# Altium PCB Layout.PcbDoc
Units mm, origin at the board's own origin, x right, y up, seen from the top; angles counter-clockwise.
Board outline 32.5 x 62 mm, 2 copper layers (Top Layer, Bottom Layer); 41 components, 15 nets, 80 pads, 20 vias.
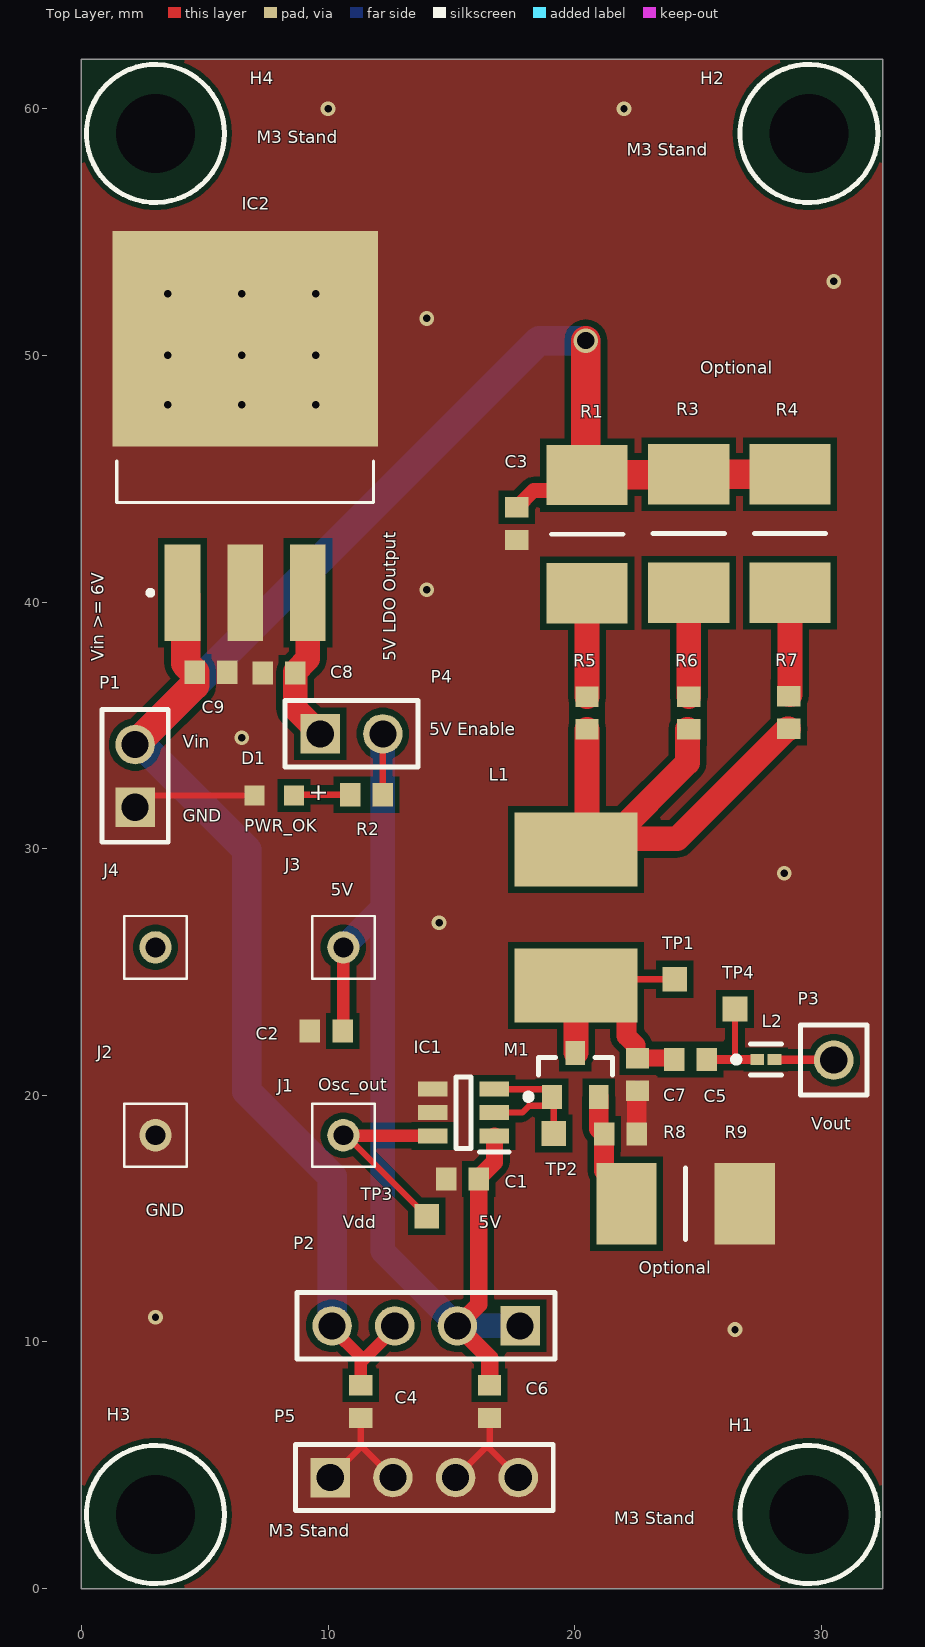
[diagram p0: Top Layer view]
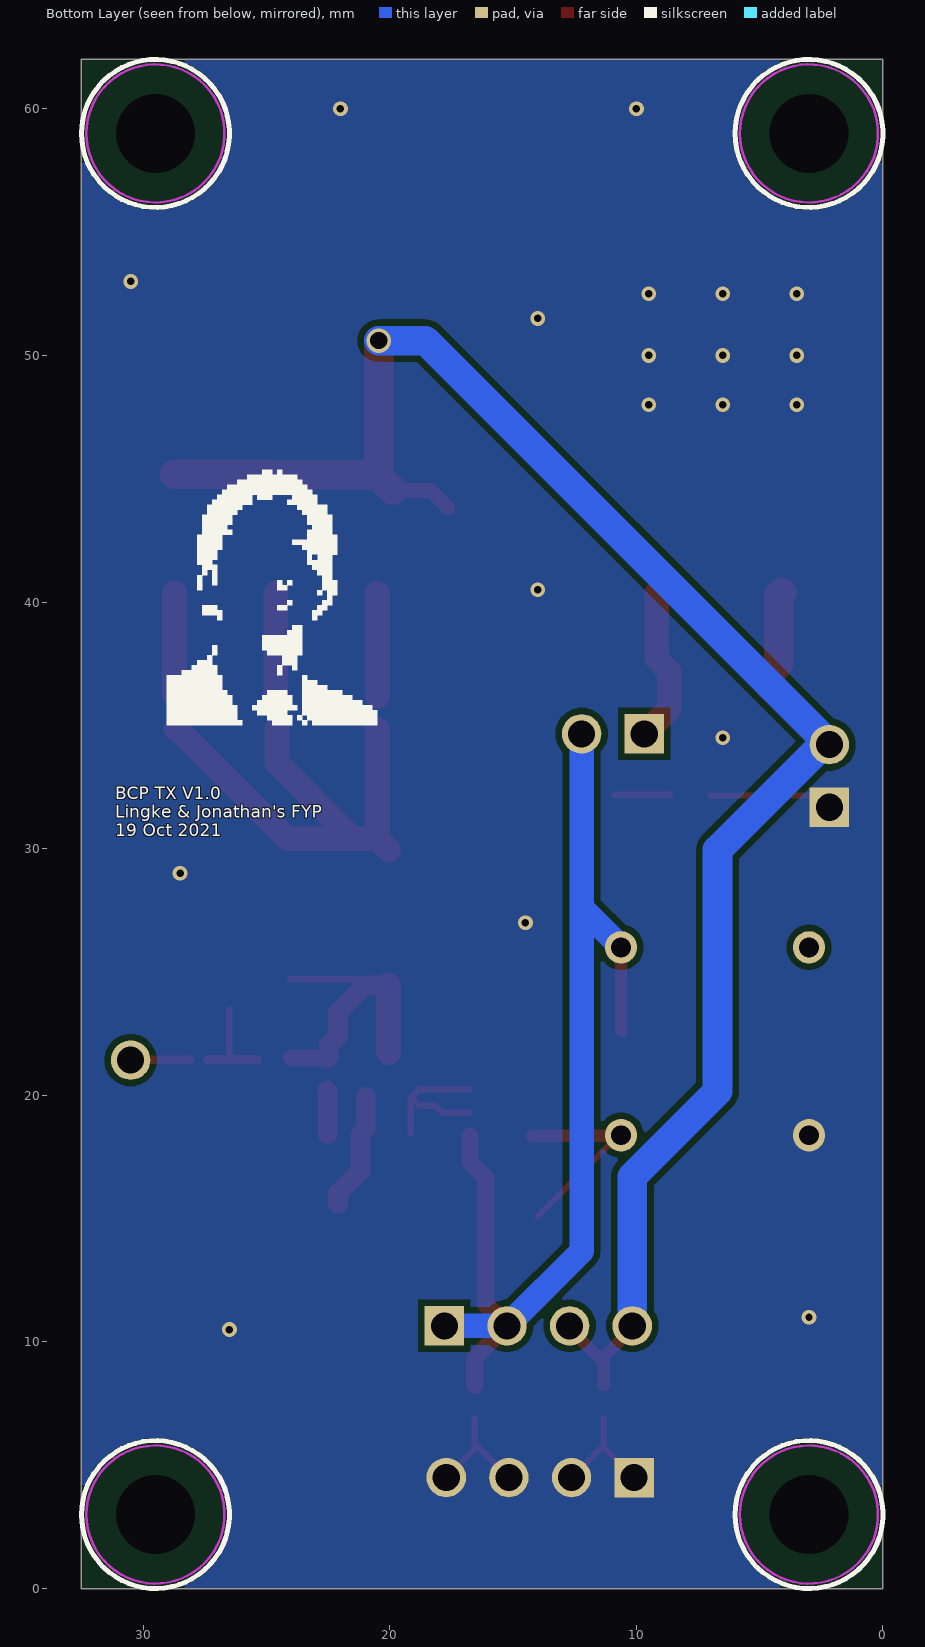
[diagram p1: Bottom Layer view, seen from below]
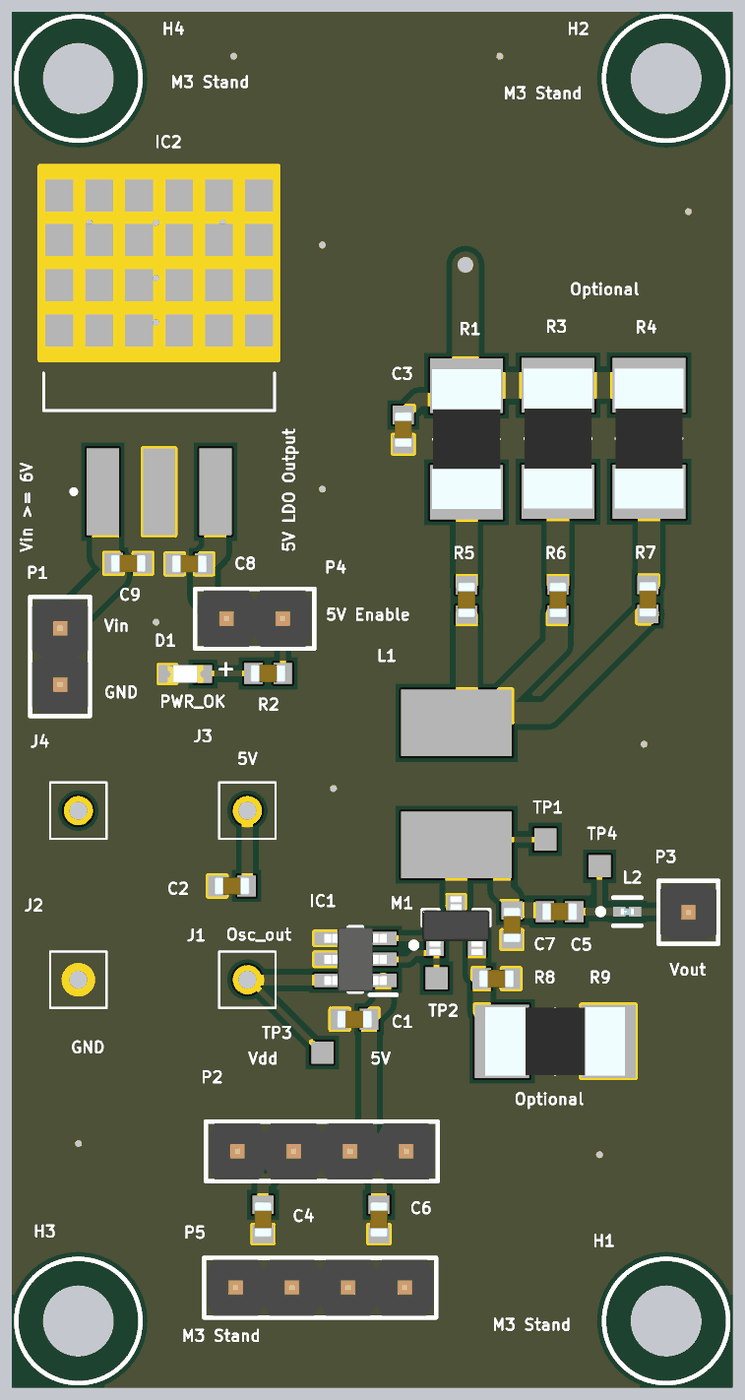
[diagram p2: 3D render of the assembled board from above, using the file's embedded part models]

## Layer stack, top to bottom
Top Solder: solder mask 0.0102, Solder Resist, Dk 3.5
Top Layer: signal copper 0.0356
Dielectric 1: dielectric 0.32, FR-4, Dk 4.8
Bottom Layer: signal copper 0.0356
Bottom Solder: solder mask 0.0102, Solder Resist, Dk 3.5

## Board outline
0,62 32.5,62 32.5,0 0,0

## Design rules (kind name [scope] priority, off if disabled: settings)
Clearance [All] p1: gap=0.254 ignorepadtopadclearanceinfootprint=TRUE except(0: Arc-Hole Track-Hole SMDPad-Hole THPad-Hole Via-Hole Fill-Hole Poly-Hole Region-Hole Text-Hole)
HoleSize [All] p1: absolutevalues=TRUE maxlimit=5 minlimit=0.025 maxpercent=80.000 minpercent=20.000
MinimumSolderMaskSliver [All] p1: minsoldermaskwidth=0.1
PlaneClearance [All] p1: clearance=0.254
PlaneConnect [All] p1: planeconnectstyle=Direct reliefexpansion=0.508 reliefentries=4 reliefconductorwidth=0.254 reliefairgap=0.254
PolygonConnect [All] p1: connectstyle=Direct reliefconductorwidth=0.254 reliefentries=4 polygonreliefangle="90 Angle" airgapwidth=0.254
RoutingVias [All] p1: holewidth=0.711 width=1.27 viastyle="Through Hole" minholewidth=0.3 minwidth=0.6 maxholewidth=2.5 maxwidth=5
SilkToSilkClearance [All] p1: silktosilkclearance=0.1
SilkToSolderMaskClearance [IsPad] p1: minsilkscreentomaskgap=0.1 clearancetoexposedcopper=TRUE
SolderMaskExpansion [All] p1: expansion=0.102 istentingtop=FALSE
Width Vdd [InNet('Vdd')] p1: maxlimit=3 minlimit=0.254 preferedwidth=1.2
Width [All] p2: maxlimit=2 minlimit=0.254 preferedwidth=0.254
24 further rules are at their usual default settings.

## Components (designator, comment, footprint, x,y, rotation, side; value= is the part's Value field where it differs from the comment)
C1 "10uF" 0603 15.45,16.6 r0 top
C2 "0.1uF" 0603 9.925,22.606 r0 top
C3 "10uF" 0603 17.65,43.175 r90 top
C4 "Capacitor" 0603 11.325,7.575 r270 top
C5 "91pF" 0603 24.699,21.45 r0 top
C6 "Capacitor" 0603 16.55,7.575 r270 top
C7 "4.7pF" 0603 22.55,20.85 r90 top
C8 "10uF" 0603 8.004,37.125 r0 top
C9 "10uF" 0603 5.25,37.15 r180 top
D1 "Super Red, 1.9V" WL-SMCW_0603_H=0.7mm 7.819,32.156 r0 top
H1 "M3 Mounting Hole" "M3 Hole" 29.5,3 r0 top
H2 "M3 Mounting Hole" "M3 Hole" 29.5,59 r0 top
H3 "M3 Mounting Hole" "M3 Hole" 3,3 r0 top
H4 "M3 Mounting Hole" "M3 Hole" 3,59 r0 top
IC1 "LM5114B" SOT-23-6 15.494,19.3 r180 top
IC2 "MIC29300-5.0WU" TO-263-3 6.64,46.725 r90 top
J1 "SSA-101-S-T" SSA-101-S-X 10.62,18.38 r0 top
J2 "SSA-101-S-T" SSA-101-S-X 3,18.38 r0 top
J3 "SSA-101-S-T" SSA-101-S-X 10.62,26 r0 top
J4 "SSA-101-S-T" SSA-101-S-X 3,26 r0 top
L1 "47nH" TPI078060L047N 20.05,24.457 r90 top
L2 "76nH" FP-LQP03PN_02-IPC_A 27.749,21.45 r0 top
M1 "IRLML0040TRPBF" SOT-23 20.025,20.825 r90 top
P1 "61300211121" 61300211121 2.175,32.95 r90 top
P2 "61300411121" 61300411121 13.975,10.65 r180 top
P3 "61300111121" 61300111121 30.505,21.425 r90 top
P4 "61300211121" 61300211121 10.95,34.656 r0 top
P5 "61300411121" 61300411121 13.9,4.501 r0 top
R1 "10R" 2512 20.5,42.75 r90 top
R2 "1K" 0603 11.55,32.186 r0 top
R3 "Optional" 2512 24.625,42.775 r90 top
R4 "Optional" 2512 28.729,42.775 r90 top
R5 "0R" 0603 20.5,35.5 r90 top
R6 "0R" 0603 24.625,35.5 r90 top
R7 "0R" 0603 28.675,35.525 r90 top
R8 "Pull Down R" 0603 21.85,18.43 r180 top
R9 "Resistor_2512" 2512 24.5,15.605 r180 top
TP1 "TP" "Test Point" 24.05,24.7 r0 top
TP2 "TP" "Test Point" 19.15,18.45 r0 top
TP3 "TP" "Test Point" 14,15.099 r0 top
TP4 "TP" "Test Point" 26.5,23.5 r0 top

## Footprints (in the part's own frame and the unit in brackets; to place one, negate y for a bottom-side part, rotate by r counter-clockwise, add the part's x,y. Pads: shape width x height; smd on the part's side, far side on the other; paste and mask are expansions set on the pad)
0603 [mm]
  rect 0.83x0.94 smd: 1(-0.66,0) 2(0.66,0)
  body extent -0.8,-0.4 0.8,0.4, height 0.9
2512 [mm]
  rect 2.45x3.3 smd: 1(-2.4,0) 2(2.4,0)
  silkscreen extent 0,-1.45 0,1.45, body extent -3.15,-1.55 3.15,1.55, height 0.8
61300111121 [mm] "Pin Header, pitch 2.54 mm, THT, Vertical, single row, 1p"
  round 1.6 hole 1.1: 1(0,0)
  silkscreen extent -1.42,-1.35 1.42,1.35, body extent -1.27,-1.27 1.27,1.27, height 8.57
61300211121 [mm] "Pin Header, pitch 2.54 mm, THT, Vertical, single row, 2p"
  rect 1.6x1.6 hole 1.1: 1(-1.27,0)
  round 1.6 hole 1.1: 2(1.27,0)
  silkscreen extent -2.69,-1.35 2.69,1.35, body extent -2.54,-1.27 2.54,1.27, height 8.57
61300411121 [mm] "Pin Header, pitch 2.54 mm, THT, Vertical, single row, 4p"
  rect 1.6x1.6 hole 1.1: 1(-3.81,0)
  round 1.6 hole 1.1: 2(-1.27,0) 3(1.27,0) 4(3.81,0)
  silkscreen extent -5.23,-1.35 5.23,1.35, body extent -5.08,-1.27 5.08,1.27, height 8.57
FP-LQP03PN_02-IPC_A [mm]
  rect 0.554x0.463 smd paste+0 mask+0: 1(-0.354,0) 2(0.354,0)
  silkscreen extent -1.32,-0.63 0.63,0.63, body extent -0.83,-0.43 0.83,0.43, height 0.25
"M3 Hole" [mm]
  round 0 hole 3.2 unplated mask+0.1: 1(0,0)
  Keep-Out Layer circle w0.1: c0,0 r2.8
  silkscreen extent -2.8,-2.8 2.8,2.8
SOT-23 [mm] "SOT23, 3-Leads, Body 3.04x1.4mm, Pitch 0.95mm"
  rect 0.972x0.802 smd: 1(-0.885,0.95) 2(-0.885,-0.95) 3(0.885,0)
  silkscreen extent -1.01,-1.5 0.7,2.03, body extent -1.32,-1.52 1.32,1.52, height 1.12
SOT-23-6 [mm]
  rect 1.2x0.6 smd: 1(-1.25,0.95) 2(-1.25,0) 3(-1.25,-0.95) 4(1.25,-0.95) 5(1.25,0) 6(1.25,0.95)
  silkscreen extent -1.85,-1.45 0.3,1.6, body extent -1.4,-1.45 1.4,1.45, height 1.2
SSA-101-S-X [mm]
  round 1.31 hole 0.81: 1(0,0)
  silkscreen extent -1.27,-1.27 1.27,1.27
"Test Point" [mm]
  rect 1x1 smd: 1(0,0)
TO-263-3 [mm]
  rect 3.92x1.45 smd: 1(-6.35,2.54) 2(-6.35,0) 3(-6.35,-2.54)
  rect 8.75x10.75 smd paste-6: 4(3.95,0)
  silkscreen extent -6.45,-5.21 -1,5.21
TPI078060L047N [mm]
  rect 3x5 smd: 1(0,0) 2(5.5,0)
WL-SMCW_0603_H=0.7mm [mm] "SMD Mono-color Chip LED, body 1.6x0.8mm"
  rect 0.8x0.8 smd: 1(-0.8,0) 2(0.8,0)
  body extent -0.8,-0.4 0.8,0.4, height 0.7

## Part data
C1 C2 C3 C5 C7 C8 C9: library part Capacitor, "Capacitor"
D1: library part 150060SS75000, "WL-SMCW SMT Mono-color Chip LED Waterclear, size 0603, Super Red, 1.9V, 140deg", Emitting Color="Super Red", Forward Voltage typ.=1.9V, Operating Temperature="-40 to +85degC", Chip Technology=AlInGaP, ComponentLink1Description=Manufacturer, ComponentLink1URL=http://www.we-online.de, ComponentLink2Description=Datasheet, ComponentLink2URL=https://www.we-online.com/catalog/datasheet/150060SS75000.pdf, Dominant Wavelength typ.=630nm, Luminous Intensity typ.=60mcd, Mounting Technology=SMT, Packaging="Tape and Reel", Part Number=150060SS75000, Peak Wavelength typ.=645nm, Published Date="December 2019", Publisher="Wurth Elektronik", Size=0603, Viewing Angle=140deg
H1 H2 H3 H4: library part M3_Mounting_hole
IC2: Supplier Part Number 1=576-1122-ND, Supplier 1=Digi-Key
J1 J2 J3 J4: "Connector", Manufacturer_Name=SAMTEC, Datasheet Link=http://suddendocs.samtec.com/prints/ssas-mkt.pdf, Manufacturer_Part_Number=SSA-101-S-T
L1: library part TPI078060L047N, Supplier Part Number 1=399-TPI078060L047NCT-ND, Supplier 1=Digi-Key
L2: library part LQP03TN75NH02D, "Film type RF Inductor 75nH ±3% 100mA 10Ω 0201 (0603)", Case Code (Imperial)=0201, Case Code (Metric)=0603, Current Rating=100mA, DC Resistance (DCR)=10R, Inductance=75nH, Max Operating Temperature=125°C, Min Operating Temperature=-55°C, Package Quantity=15000, Resistor Type="Thin Film", Self Resonant Frequency=1GHz, Supplier Part Number 1=490-13018-1-ND, Test Frequency=300MHz, Tolerance=3%, Case/Package=0201, Core Material=Non-Magnetic, Height=0.3mm, Height - Seated (Max)=0.013inch, Length=0.024inch, Max DC Current=100mA, Mount="Surface Mount", Packaging="Tape and Reel", Q Factor=8, RoHS Compliant=Yes, Shielding=Unshielded, Supplier 1=Digi-Key, Termination=SMD/SMT, Weight=6E-06oz, Width=0.012inch
M1: "HEXFET(R) Power MOSFET, 40 V, -55 to 150 degC, 3-Pin SOT-23, RoHS, Tape and Reel", Manufacturer="International Rectifier", Maximum Continuous Drain Current=3.6A, Maximum Drain Source Resistance=0.056Ω, Maximum Drain Source Voltage=40V, Maximum Gate Source Voltage=±16V, Maximum Gate Threshold Voltage=2.5V, Maximum Operating Temperature=+150°C, Maximum Power Dissipation=1.3W, Minimum Gate Threshold Voltage=1V, Minimum Operating Temperature=-55°C, Package Description="3-Pin Small Outline Transistor, Body 2.92 x 1.3 mm, Pitch 0.95 mm", Package Reference=SOT-23, Typical Input Capacitance @ Vds=266pF@25V, Category=PowerMOSFET, Channel Mode=Enhancement, Channel Type=N, Datasheet URL=https://datasheet.ciiva.com/22709/irlml0040pbf-22709201.pdf, Datasheet Version=02/2012, Dimensions=3.04x1.4x1.02mm, Height=1.02mm, Length=3.04mm, Manufacturer URL=http://internationalrectifier.com/, Mounting Technology=SurfaceMount, Mounting Type=SurfaceMount, Number of Elements per Chip=1, Package Type=SOT-23, Pin Count=3, Transistor Configuration=Single, Transistor Material=Si, Typical Gate Charge @ Vgs=2.6nC@4.5V, Typical Turn-Off Delay Time=6.4ns, Typical Turn-On Delay Time=5.1ns, Width=1.4mm
P1 P4: "WR-PHD Pin Header, THT, pitch 2.54mm, Single Row, Vertical, 2p", Contact Resistance=20mOhm, Manufacturer="Wurth Elektronik", Operating Temperature="-40 to +105degC", Rated Current=3A, Withstanding Voltage=500VAC, Working Voltage=250VAC, ComponentLink1Description=Manufacturer, ComponentLink1URL=http://www.we-online.de, ComponentLink2Description=Datasheet, ComponentLink2URL=https://www.we-online.com/catalog/datasheet/61300211121.pdf, Gender="Pin Header", Manufacturer Part Number=61300211121, Mounting Technology=THT, Orientation=Vertical, Packaging=Bag, Pin Number=2, Pitch=2.54mm, Published Date="May 2020", Row Number=Single
P2 P5: "WR-PHD Pin Header, THT, pitch 2.54mm, Single Row, Vertical, 4p", Contact Resistance=20mOhm, Manufacturer="Wurth Elektronik", Operating Temperature="-40 to +105degC", Rated Current=3A, Withstanding Voltage=500VAC, Working Voltage=250VAC, ComponentLink1Description=Manufacturer, ComponentLink1URL=http://www.we-online.de, ComponentLink2Description=Datasheet, ComponentLink2URL=https://www.we-online.com/catalog/datasheet/61300411121.pdf, Gender="Pin Header", Manufacturer Part Number=61300411121, Mounting Technology=THT, Orientation=Vertical, Packaging=Bag, Pin Number=4, Pitch=2.54mm, Published Date="May 2020", Row Number=Single
P3: "WR-PHD Pin Header, THT, pitch 2.54mm, Single Row, Vertical, 1p", Contact Resistance=20mOhm, Manufacturer="Wurth Elektronik", Operating Temperature="-40 to +105degC", Rated Current=3A, Withstanding Voltage=500VAC, Working Voltage=250VAC, ComponentLink1Description=Manufacturer, ComponentLink1URL=http://www.we-online.de, ComponentLink2Description=Datasheet, ComponentLink2URL=https://www.we-online.com/catalog/datasheet/61300111121.pdf, Gender="Pin Header", Manufacturer Part Number=61300111121, Mounting Technology=THT, Orientation=Vertical, Packaging=Bag, Pin Number=1, Pitch=2.54mm, Published Date="May 2020", Row Number=Single
R1 R3 R4: library part Resistor_2512, "Resistor"
R2 R5 R6 R7 R8: library part Resistor, "Resistor"
R9: "Resistor"
TP1 TP2 TP3 TP4: library part "Test Point", "Test Point 1mm by 1mm"

## Via types
v1: diameter 0.6, hole 0.3, Top Layer to Bottom Layer, 19 vias
v2: diameter 1, hole 0.7, Top Layer to Bottom Layer, 1 vias

## Nets (pads, with @x,y where several pads share a name; then routed paths per layer and width w, separated by ;. In a path a pad name is that pad's centre, name@x,y a point inside that pad or via, vN(x,y) a via of type N, cw(c..) or ccw(c..) an arc to the next point about the centre after c; other vN are vias at no path point)
5V: C1.2 C2.2 C6.1 IC1.1 J3.1 P2.1 P2.2 P4.2 R2.2 | length 47.2
  Top Layer w0.254: R2.2 12.22,32.196 P4.2
  Top Layer w0.5: C2.2 10.62,22.641 J3.1
  Top Layer w0.7: C6.1 16.55,9.345 P2.2 16.11,11.515 C1.2 16.11,16.655 16.744,17.289 IC1.1
  Bottom Layer w1: J3.1 12.22,27.6 ; P4.2 12.22,27.6 ; P2.1 P2.2 12.22,13.675 12.22,27.6
GND: C1.1 C2.1 C3.1 C4.2 C6.2 C7.1 C8.1 C9.1 D1.1 IC1.4 IC1.5 IC2.2 IC2.4 J2.1 P1.1 P5.1 P5.2 P5.3 P5.4 R8.1 R9.1 | length 16.4
  Top Layer w0.254: P1.1 2.651,32.156 D1.1 ; P5.1 11.325,5.736 ; C4.2 11.325,5.736 ; P5.2 11.395,5.736 11.325,5.736 ; P5.3 16.55,5.881 ; C6.2 16.55,5.881 ; P5.4 16.55,5.661 16.55,5.881
  Top Layer w0.8: R8.1 22.51,20.15 C7.1
  other v1: 26.5,10.5 3,11 14.5,27 28.5,29 6.5,34.5 14,40.5 3.5,48 6.5,48 9.5,48 3.5,50 6.5,50 9.5,50 14,51.5 3.5,52.5 6.5,52.5 9.5,52.5 30.5,53 10,60 22,60
NetC5_1: C5.1 C7.2 L1.1 M1.3 TP1.1 | length 15.7
  Top Layer w0.254: M1.3 M1.3@20.05,21.735 ; L1.1@22.207,23.084 20.834,24.457 L1.1 20.293,24.7 TP1.1 ; C5.1@23.979,21.51 C5.1
  Top Layer w0.7: C7.2 C5.1@23.979,21.51
  Top Layer w0.8: L1.1 20.999,24.457 22.099,23.357 22.099,22.408 22.48,22.027 22.48,21.525 22.495,21.51 C7.2
  Top Layer w1: M1.3@20.05,21.735 L1.1
NetC5_2: C5.2 L2.1 TP4.1 | length 4.1
  Top Layer w0.254: 26.5,21.45 TP4.1
  Top Layer w0.35: C5.2 26.5,21.45 L2.1
NetC8_2: C8.2 IC2.3 P4.1 | length 6.4
  Top Layer w1: IC2.3 9.18,37.696 8.664,37.18 C8.2 8.664,35.671 P4.1
NetD1_2: D1.2 R2.1 | length 2.3
  Top Layer w0.254: D1.2 8.649,32.186 R2.1
NetIC1_2: IC1.2 IC1.3 M1.1 TP2.1 | length 6.6
  Top Layer w0.254: IC1.2 17.868,19.3 18.149,19.581 18.801,19.581 19.075,19.855 M1.1 ; IC1.3 18.801,20.25 19.075,19.976 M1.1 ; TP2.1 19.15,19.865 M1.1
NetL1_2: L1.2 R5.1 R6.1 R7.1 | length 20.8
  Top Layer w1: L1.2 L1.2@20.493,30.4 ; R5.1 20.5,30.407 L1.2@20.493,30.4 ; R6.1@24.57,34.84 24.57,33.477 L1.2@21.493,30.4 ; R7.1 28.62,34.865 24.155,30.4 L1.2@21.493,30.4 ; L1.2@20.493,30.4 L1.2@21.493,30.4
NetM1_2: M1.2 R8.2 R9.2 | length 4.8
  Top Layer w0.8: M1.2 20.975,18.645 R8.2 21.19,16.94 22.1,16.03 R9.2
NetR1_1: R1.1 R5.2 | length 4.2
  Top Layer w1: R5.2 R1.1
NetR3_1: R3.1 R6.2 | length 4.2
  Top Layer w1: R6.2 R3.1
NetR4_1: R4.1 R7.2 | length 4.2
  Top Layer w0.254: R7.2 R7.2@28.729,36.239
  Top Layer w1: R7.2@28.729,36.239 R4.1
Oscillator_out: IC1.6 J1.1 TP3.1 | length 8.3
  Top Layer w0.254: J1.1 10.719,18.38 10.734,18.365 TP3.1
  Top Layer w0.5: J1.1@10.734,18.365 14.229,18.365 IC1.6
Vdd: C3.2 C4.1 C9.2 IC2.1 P1.2 P2.3 P2.4 R1.2 R3.2 R4.2 | length 81.5
  Top Layer w0.5: P2.4 10.165,10.542 11.325,9.382 11.325,9.162 ; C4.1 11.325,9.162 ; P2.3 12.705,10.542 11.325,9.162
  Top Layer w0.6: C3.2 18.34,44.525 R1.2@19.875,44.525
  Top Layer w1.2: P1.2 4.59,36.635 C9.2 4.225,37.515 4.225,40.25 IC2.1 ; R1.2@19.875,44.525 R1.2 ; v2(20.45,50.6) 20.45,45.2 R1.2 ; R4.2 R3.2 24.613,45.163 20.512,45.163 R1.2
  Bottom Layer w1.2: P2.4 10.165,16.701 6.709,20.157 6.709,29.954 2.519,34.143 2.252,34.143 P1.2 18.555,50.6 v2(20.45,50.6)
Vout: L2.2 P3.1 | length 2.4
  Top Layer w0.35: L2.2 28.116,21.437 30.492,21.437 P3.1
pads on no net: H1.1 H2.1 H3.1 H4.1 J4.1

## Polygon pours and split planes (outlines as drawn)
GND on Bottom Layer "GND_L02_P000" (solid, remove dead copper, pour order 0): 0,62 32.5,62 32.5,0 0,0
GND on Top Layer "GND_L01_P001" (solid, remove dead copper, pour order 1): 0,62 32.5,62 32.5,0 0,0

## Silkscreen, mask and mechanical layers (free items; w line width, h text height)
Top Overlay:
  text "M3 Stand" at 7.1,58.6 h0.5
  text "M3 Stand" at 22.1,58.1 h0.5
  text "Optional" at 25.1,49.267 h0.5
  text "Vin >= 6V" at 0.9,37.6 h0.5 r90
  text "5V LDO Output" at 12.733,37.6 h0.5 r90
  text "5V Enable" at 14.1,34.6 h0.5
  text "Vin" at 4.1,34.1 h0.5
  text "GND" at 4.1,31.1 h0.5
  text "PWR_OK" at 6.6,30.683 h0.5
  text "5V" at 10.1,28.1 h0.5
  text "Osc_out" at 9.6,20.183 h0.5
  text "Vout" at 29.6,18.6 h0.5
  text "GND" at 2.6,15.1 h0.5
  text "Vdd" at 10.6,14.6 h0.5
  text "5V" at 16.1,14.6 h0.5
  text "Optional" at 22.6,12.767 h0.5
  text "M3 Stand" at 21.6,2.6 h0.5
  text "M3 Stand" at 7.6,2.1 h0.5
Bottom Overlay:
  drawing of 8 lines, arcs and shapes, not listed
  text "BCP TX V1.0 / Lingke & Jonathan's FYP / 19 Oct 2021" at 31.14,30.5 h0.5
Board Outline:
  the board outline again, w0.05

## Text inside footprints (layer, text, board x,y; h text height)
D1: Top Overlay "+" at 9.919,31.856 h0.7 r90